# EAGLE board GrapherBlanK7_production_flipped (EAGLE 5.10)
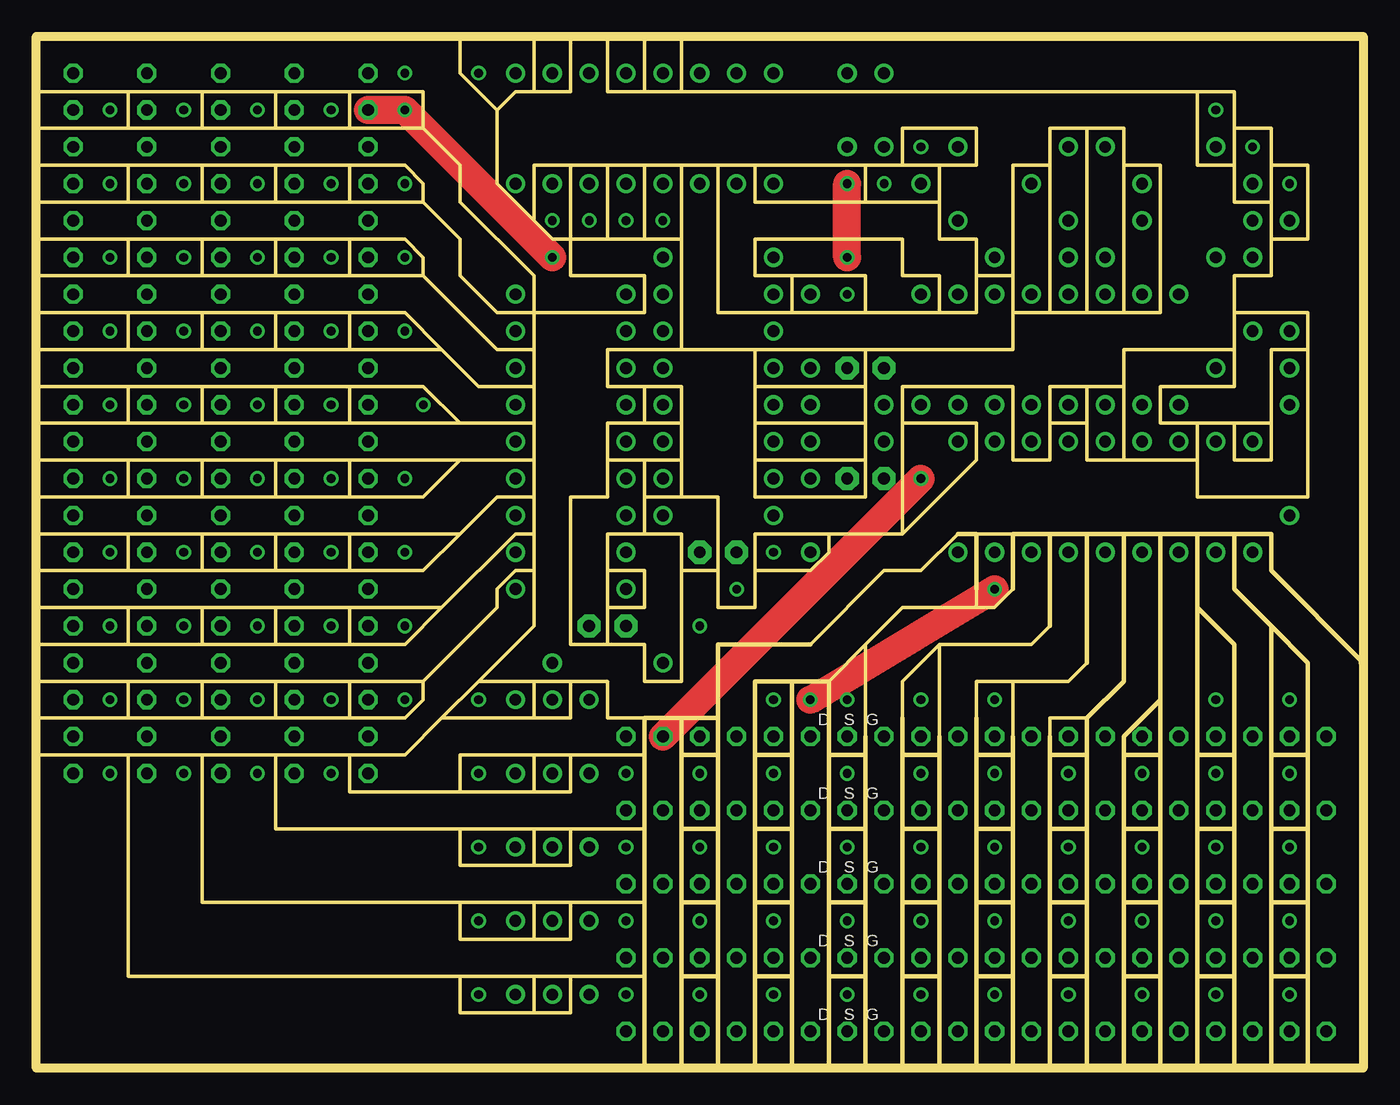
[diagram p0: board, top side]
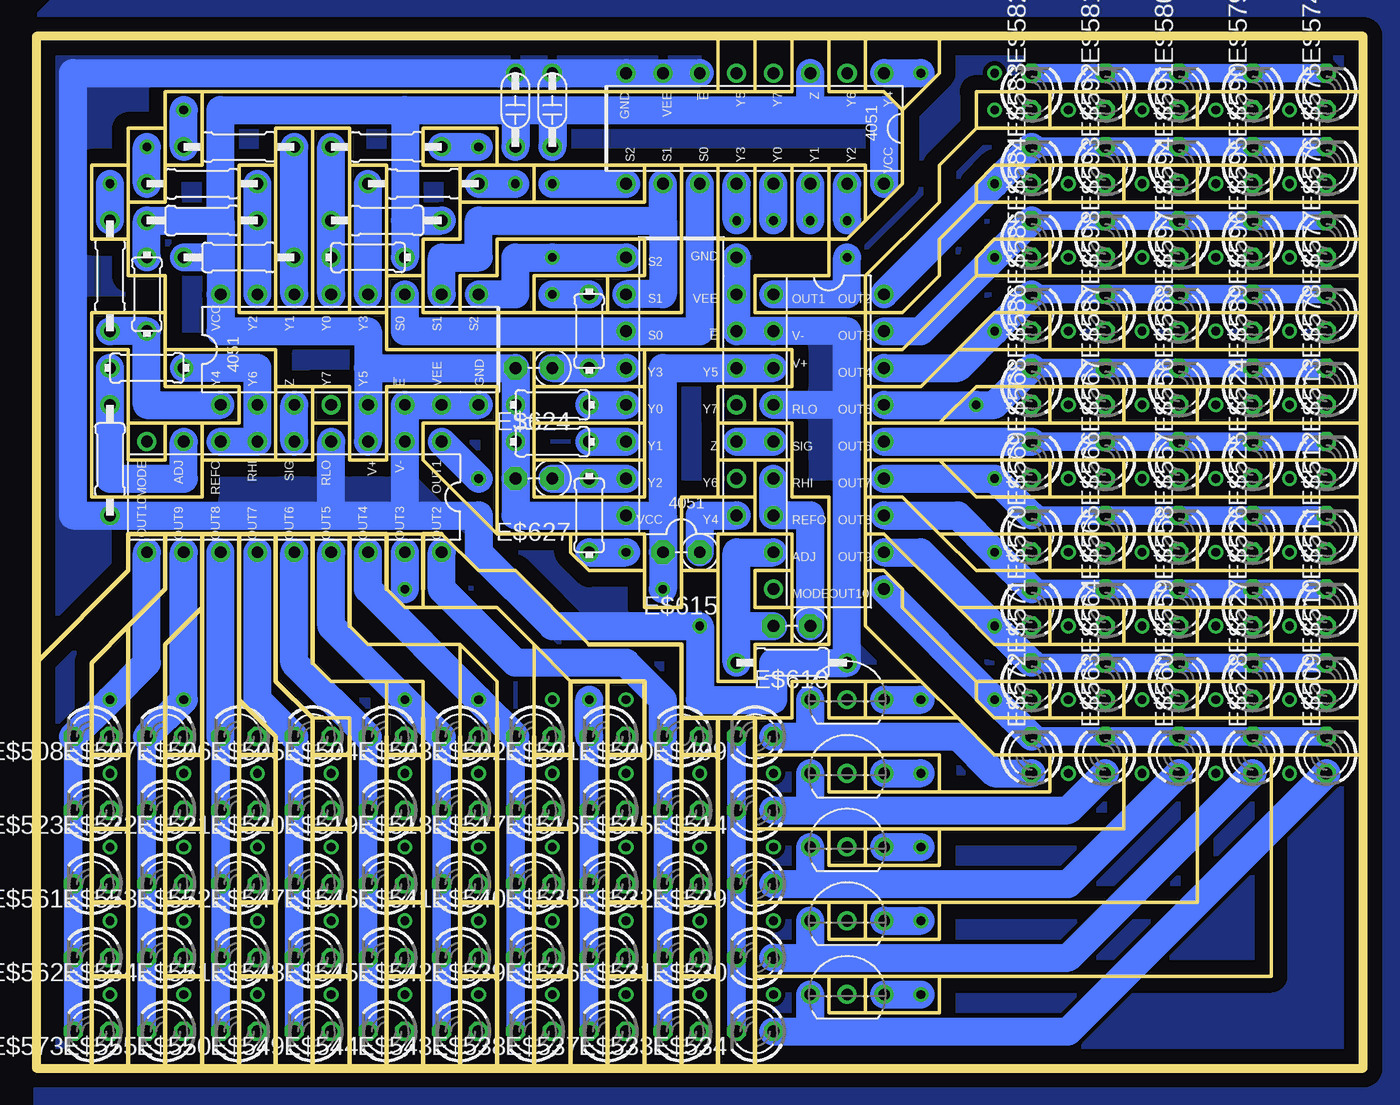
[diagram p1: board, bottom side, seen from below]

Size 91.44 x 71.12 mm. Coordinates in mm from the lower left corner, seen from the top.
Outline: 0,21.59 0,0 41.91,0
Outline: 0,21.59 0,24.13
Outline: 0,24.13 0,26.67
Outline: 0,26.67 0,29.21
Outline: 0,29.21 0,31.75
Outline: 0,31.75 0,34.29
Outline: 0,34.29 0,36.83
Outline: 0,36.83 0,39.37
Outline: 0,39.37 0,41.91
Outline: 0,41.91 0,44.45
Outline: 0,44.45 0,46.99
Outline: 0,46.99 0,49.53
Outline: 0,49.53 0,52.07
Outline: 0,52.07 0,54.61
Outline: 0,54.61 0,57.15
Outline: 0,57.15 0,59.69
Outline: 0,59.69 0,62.23
Outline: 0,62.23 0,64.77
Outline: 0,64.77 0,67.31
Outline: 0,67.31 0,71.12 29.21,71.12
Outline: 29.21,71.12 34.29,71.12
Outline: 34.29,71.12 36.83,71.12
Outline: 36.83,71.12 39.37,71.12
Outline: 39.37,71.12 41.91,71.12
Outline: 41.91,71.12 44.45,71.12
Outline: 44.45,71.12 91.44,71.12 91.44,27.94
Outline: 91.44,27.94 91.44,0 87.63,0
Outline: 87.63,0 85.09,0
Outline: 85.09,0 82.55,0
Outline: 82.55,0 80.01,0
Outline: 80.01,0 77.47,0
Outline: 77.47,0 74.93,0
Outline: 74.93,0 72.39,0
Outline: 72.39,0 69.85,0
Outline: 69.85,0 67.31,0
Outline: 67.31,0 64.77,0
Outline: 64.77,0 62.23,0
Outline: 62.23,0 59.69,0
Outline: 59.69,0 57.15,0
Outline: 57.15,0 54.61,0
Outline: 54.61,0 52.07,0
Outline: 52.07,0 49.53,0
Outline: 49.53,0 46.99,0
Outline: 46.99,0 44.45,0
Outline: 44.45,0 41.91,0
Outline: 87.63,0 87.63,6.35
Outline: 87.63,6.35 87.63,11.43
Outline: 87.63,11.43 87.63,16.51
Outline: 87.63,16.51 87.63,21.59
Outline: 87.63,21.59 87.63,27.94 85.09,30.48
Outline: 85.09,30.48 82.55,33.02 82.55,36.83
Outline: 82.55,36.83 85.09,36.83 85.09,34.29 91.44,27.94
Outline: 82.55,36.83 80.01,36.83
Outline: 80.01,36.83 80.01,31.75
Outline: 80.01,31.75 82.55,29.21 82.55,21.59
Outline: 82.55,21.59 82.55,16.51
Outline: 82.55,16.51 82.55,11.43
Outline: 82.55,11.43 82.55,6.35
Outline: 82.55,6.35 82.55,0
Outline: 85.09,0 85.09,6.35
Outline: 85.09,6.35 85.09,11.43
Outline: 85.09,11.43 85.09,16.51
Outline: 85.09,16.51 85.09,21.59
Outline: 85.09,21.59 85.09,30.48
Outline: 80.01,0 80.01,6.35
Outline: 80.01,6.35 80.01,11.43
Outline: 80.01,11.43 80.01,16.51
Outline: 80.01,16.51 80.01,21.59
Outline: 80.01,21.59 80.01,31.75
Outline: 77.47,0 77.47,6.35
Outline: 77.47,6.35 77.47,11.43
Outline: 77.47,11.43 77.47,16.51
Outline: 77.47,16.51 77.47,21.59
Outline: 77.47,21.59 77.47,25.4
Outline: 77.47,25.4 77.47,36.83
Outline: 77.47,36.83 80.01,36.83
Outline: 77.47,36.83 74.93,36.83
Outline: 74.93,36.83 74.93,26.67 72.39,24.13
Outline: 72.39,24.13 72.39,21.59
Outline: 72.39,21.59 72.39,16.51
Outline: 72.39,16.51 72.39,11.43
Outline: 72.39,11.43 72.39,6.35
Outline: 72.39,6.35 72.39,0
Outline: 74.93,0 74.93,6.35
Outline: 74.93,6.35 74.93,11.43
Outline: 74.93,11.43 74.93,16.51
Outline: 74.93,16.51 74.93,21.59
Outline: 74.93,21.59 74.93,22.86 77.47,25.4
Outline: 69.85,0 69.85,6.35
Outline: 69.85,6.35 69.85,11.43
Outline: 69.85,11.43 69.85,16.51
Outline: 69.85,16.51 69.85,21.59
Outline: 69.85,21.59 69.85,22.86 69.85,24.13 72.39,24.13
Outline: 67.31,0 67.31,6.35
Outline: 67.31,6.35 67.31,11.43
Outline: 67.31,11.43 67.31,16.51
Outline: 67.31,16.51 67.31,21.59
Outline: 67.31,21.59 67.31,22.86 67.31,26.67
Outline: 72.39,36.83 72.39,27.94 71.12,26.67 67.31,26.67
Outline: 72.39,36.83 74.93,36.83
Outline: 64.77,0 64.77,6.35
Outline: 64.77,6.35 64.77,11.43
Outline: 64.77,11.43 64.77,16.51
Outline: 64.77,16.51 64.77,21.59
Outline: 64.77,21.59 64.77,24.13 64.77,26.67 67.31,26.67
Outline: 62.23,0 62.23,6.35
Outline: 62.23,6.35 62.23,11.43
Outline: 62.23,11.43 62.23,16.51
Outline: 62.23,16.51 62.23,21.59
Outline: 62.23,21.59 62.23,22.86 62.23,29.21
Outline: 69.85,36.83 69.85,30.48 68.58,29.21 62.23,29.21
Outline: 69.85,36.83 72.39,36.83
Outline: 85.09,21.59 87.63,21.59
Outline: 85.09,16.51 87.63,16.51
Outline: 85.09,11.43 87.63,11.43
Outline: 85.09,6.35 87.63,6.35
Outline: 80.01,6.35 82.55,6.35
Outline: 80.01,11.43 82.55,11.43
Outline: 80.01,16.51 82.55,16.51
Outline: 80.01,21.59 82.55,21.59
Outline: 74.93,6.35 77.47,6.35
Outline: 74.93,11.43 77.47,11.43
Outline: 74.93,16.51 77.47,16.51
Outline: 74.93,21.59 77.47,21.59
Outline: 69.85,6.35 72.39,6.35
Outline: 69.85,11.43 72.39,11.43
Outline: 69.85,16.51 72.39,16.51
Outline: 69.85,21.59 72.39,21.59
Outline: 64.77,6.35 67.31,6.35
Outline: 64.77,11.43 67.31,11.43
Outline: 64.77,16.51 67.31,16.51
Outline: 64.77,21.59 67.31,21.59
Outline: 59.69,0 59.69,6.35
Outline: 59.69,6.35 59.69,11.43
Outline: 59.69,11.43 59.69,16.51
Outline: 59.69,16.51 59.69,21.59
Outline: 59.69,21.59 59.69,24.13 59.69,26.67 62.23,29.21
Outline: 57.15,0 57.15,6.35
Outline: 57.15,6.35 57.15,11.43
Outline: 57.15,11.43 57.15,16.51
Outline: 57.15,16.51 57.15,21.59
Outline: 57.15,21.59 57.15,22.86 57.15,29.21
Outline: 67.31,36.83 67.31,33.02 66.04,31.75 64.77,31.75
Outline: 67.31,36.83 69.85,36.83
Outline: 62.23,21.59 59.69,21.59
Outline: 62.23,16.51 59.69,16.51
Outline: 59.69,11.43 62.23,11.43
Outline: 59.69,6.35 62.23,6.35
Outline: 54.61,0 54.61,6.35
Outline: 54.61,6.35 54.61,11.43
Outline: 54.61,11.43 54.61,16.51
Outline: 54.61,16.51 54.61,21.59
Outline: 54.61,21.59 54.61,26.67
Outline: 54.61,26.67 52.07,26.67
Outline: 52.07,26.67 52.07,21.59
Outline: 52.07,21.59 52.07,16.51
Outline: 52.07,16.51 52.07,11.43
Outline: 52.07,11.43 52.07,6.35
Outline: 52.07,6.35 52.07,0
Outline: 46.99,0 46.99,6.35
Outline: 46.99,6.35 46.99,11.43
Outline: 46.99,11.43 46.99,16.51
Outline: 46.99,16.51 46.99,21.59
Outline: 46.99,21.59 46.99,24.13
Outline: 46.99,24.13 46.99,29.21 53.34,29.21 58.42,34.29 60.96,34.29 63.5,36.83 64.77,36.83
Outline: 64.77,36.83 64.77,33.02 64.77,31.75
Outline: 52.07,26.67 49.53,26.67 49.53,21.59
Outline: 49.53,21.59 49.53,16.51
Outline: 49.53,16.51 49.53,11.43
Outline: 49.53,11.43 49.53,6.35
Outline: 49.53,6.35 49.53,0
Outline: 44.45,0 44.45,6.35
Outline: 44.45,6.35 44.45,11.43
Outline: 44.45,11.43 44.45,16.51
Outline: 44.45,16.51 44.45,21.59
Outline: 44.45,21.59 44.45,24.13
Outline: 44.45,24.13 41.91,24.13
Outline: 41.91,24.13 41.91,21.59
Outline: 41.91,21.59 41.91,16.51
Outline: 41.91,16.51 41.91,11.43
Outline: 41.91,11.43 41.91,6.35
Outline: 41.91,6.35 41.91,0
Outline: 44.45,24.13 46.99,24.13
Outline: 57.15,21.59 54.61,21.59
Outline: 57.15,16.51 54.61,16.51
Outline: 57.15,11.43 54.61,11.43
Outline: 57.15,6.35 54.61,6.35
Outline: 52.07,6.35 49.53,6.35
Outline: 52.07,11.43 49.53,11.43
Outline: 52.07,16.51 49.53,16.51
Outline: 52.07,21.59 49.53,21.59
Outline: 46.99,6.35 44.45,6.35
Outline: 46.99,11.43 44.45,11.43
Outline: 46.99,16.51 44.45,16.51
Outline: 46.99,21.59 44.45,21.59
Outline: 87.63,49.53 85.09,49.53 85.09,44.45
Outline: 85.09,44.45 85.09,41.91 82.55,41.91 82.55,44.45
Outline: 82.55,44.45 80.01,44.45
Outline: 80.01,44.45 80.01,41.91
Outline: 80.01,41.91 80.01,39.37 87.63,39.37 87.63,49.53
Outline: 87.63,49.53 87.63,52.07 82.55,52.07
Outline: 82.55,52.07 82.55,49.53
Outline: 82.55,49.53 82.55,46.99 77.47,46.99 77.47,44.45 80.01,44.45
Outline: 82.55,44.45 85.09,44.45
Outline: 80.01,41.91 74.93,41.91
Outline: 74.93,41.91 74.93,46.99
Outline: 74.93,46.99 74.93,49.53 82.55,49.53
Outline: 74.93,46.99 72.39,46.99
Outline: 72.39,46.99 72.39,44.45
Outline: 72.39,44.45 72.39,41.91 74.93,41.91
Outline: 72.39,44.45 69.85,44.45
Outline: 69.85,44.45 69.85,46.99 72.39,46.99
Outline: 85.09,59.69 82.55,59.69 82.55,62.23
Outline: 82.55,62.23 80.01,62.23 80.01,67.31
Outline: 80.01,67.31 44.45,67.31
Outline: 44.45,67.31 41.91,67.31
Outline: 41.91,67.31 39.37,67.31 39.37,71.12
Outline: 36.83,71.12 36.83,67.31 34.29,67.31
Outline: 34.29,67.31 33.02,67.31 31.75,66.04
Outline: 31.75,66.04 31.75,60.96 34.29,58.42
Outline: 36.83,62.23 34.29,62.23 34.29,58.42
Outline: 36.83,62.23 39.37,62.23
Outline: 39.37,62.23 41.91,62.23
Outline: 41.91,62.23 44.45,62.23
Outline: 57.15,62.23 59.69,62.23
Outline: 59.69,62.23 59.69,64.77 64.77,64.77 64.77,62.23 62.23,62.23
Outline: 62.23,62.23 62.23,59.69
Outline: 62.23,59.69 62.23,57.15 64.77,57.15 64.77,54.61
Outline: 64.77,54.61 67.31,54.61
Outline: 67.31,54.61 67.31,62.23 69.85,62.23
Outline: 72.39,64.77 69.85,64.77 69.85,62.23
Outline: 72.39,64.77 74.93,64.77 74.93,62.23
Outline: 74.93,52.07 77.47,52.07 77.47,62.23 74.93,62.23
Outline: 74.93,52.07 72.39,52.07
Outline: 72.39,52.07 69.85,52.07
Outline: 69.85,52.07 67.31,52.07
Outline: 67.31,52.07 67.31,49.53 57.15,49.53
Outline: 57.15,49.53 49.53,49.53
Outline: 49.53,49.53 44.45,49.53
Outline: 44.45,49.53 44.45,57.15
Outline: 44.45,57.15 44.45,62.23
Outline: 44.45,62.23 46.99,62.23
Outline: 46.99,62.23 46.99,52.07 52.07,52.07
Outline: 52.07,52.07 57.15,52.07
Outline: 57.15,52.07 62.23,52.07
Outline: 62.23,52.07 64.77,52.07 64.77,54.61
Outline: 67.31,52.07 67.31,54.61
Outline: 74.93,62.23 74.93,52.07
Outline: 72.39,52.07 72.39,64.77
Outline: 69.85,62.23 69.85,52.07
Outline: 59.69,62.23 62.23,62.23
Outline: 62.23,59.69 57.15,59.69
Outline: 57.15,59.69 57.15,62.23
Outline: 49.53,62.23 49.53,59.69 57.15,59.69
Outline: 49.53,62.23 57.15,62.23
Outline: 62.23,52.07 62.23,54.61 59.69,54.61 59.69,57.15 49.53,57.15 49.53,54.61 52.07,54.61
Outline: 57.15,52.07 57.15,54.61 52.07,54.61
Outline: 52.07,54.61 52.07,52.07
Outline: 46.99,62.23 49.53,62.23
Outline: 36.83,57.15 35.56,57.15 34.29,58.42
Outline: 36.83,57.15 36.83,62.23
Outline: 36.83,57.15 39.37,57.15
Outline: 39.37,57.15 39.37,62.23
Outline: 39.37,57.15 41.91,57.15
Outline: 41.91,57.15 41.91,62.23
Outline: 41.91,57.15 44.45,57.15
Outline: 36.83,57.15 36.83,54.61 41.91,54.61 41.91,52.07 34.29,52.07
Outline: 34.29,52.07 34.29,54.61 29.21,59.69 29.21,62.23 26.67,64.77
Outline: 44.45,49.53 39.37,49.53 39.37,46.99 41.91,46.99
Outline: 41.91,46.99 44.45,46.99 44.45,44.45
Outline: 46.99,34.29 46.99,39.37 44.45,39.37
Outline: 46.99,34.29 46.99,31.75 49.53,31.75 49.53,34.29
Outline: 49.53,34.29 49.53,36.83 54.61,36.83
Outline: 54.61,36.83 59.69,36.83
Outline: 59.69,44.45 59.69,46.99 67.31,46.99 67.31,41.91 69.85,41.91 69.85,44.45
Outline: 85.09,59.69 85.09,57.15
Outline: 85.09,57.15 85.09,54.61 82.55,54.61 82.55,52.07
Outline: 80.01,67.31 82.55,67.31 82.55,64.77
Outline: 82.55,64.77 82.55,62.23
Outline: 82.55,64.77 85.09,64.77 85.09,62.23
Outline: 85.09,62.23 85.09,59.69
Outline: 85.09,62.23 87.63,62.23 87.63,57.15 85.09,57.15
Outline: 49.53,34.29 53.34,34.29 54.61,35.56 54.61,36.83
Outline: 59.69,44.45 64.77,44.45 64.77,41.91 59.69,36.83
Outline: 49.53,41.91 49.53,39.37 57.15,39.37 57.15,41.91
Outline: 49.53,41.91 49.53,44.45
Outline: 49.53,44.45 49.53,46.99
Outline: 49.53,46.99 49.53,49.53
Outline: 57.15,41.91 57.15,44.45
Outline: 57.15,44.45 57.15,46.99
Outline: 57.15,46.99 57.15,49.53
Outline: 57.15,46.99 49.53,46.99
Outline: 49.53,44.45 57.15,44.45
Outline: 57.15,41.91 49.53,41.91
Outline: 29.21,71.12 29.21,68.58 31.75,66.04
Outline: 34.29,71.12 34.29,67.31
Outline: 39.37,29.21 41.91,29.21 41.91,26.67 44.45,26.67 44.45,34.29
Outline: 39.37,29.21 39.37,31.75
Outline: 39.37,31.75 41.91,31.75 41.91,34.29 39.37,34.29
Outline: 39.37,34.29 39.37,36.83 41.91,36.83
Outline: 41.91,36.83 44.45,36.83 44.45,34.29
Outline: 44.45,34.29 46.99,34.29
Outline: 44.45,39.37 41.91,39.37
Outline: 41.91,39.37 41.91,36.83
Outline: 41.91,39.37 41.91,41.91
Outline: 41.91,41.91 39.37,41.91
Outline: 39.37,41.91 39.37,39.37 36.83,39.37 36.83,29.21 39.37,29.21
Outline: 39.37,41.91 39.37,44.45 41.91,44.45
Outline: 41.91,44.45 44.45,44.45
Outline: 44.45,44.45 44.45,41.91
Outline: 44.45,41.91 41.91,41.91
Outline: 44.45,41.91 44.45,39.37
Outline: 41.91,44.45 41.91,46.99
Outline: 39.37,31.75 39.37,34.29
Outline: 41.91,24.13 39.37,24.13 39.37,26.67 36.83,26.67
Outline: 36.83,26.67 36.83,24.13 34.29,24.13
Outline: 34.29,24.13 34.29,26.67
Outline: 34.29,26.67 36.83,26.67
Outline: 34.29,24.13 27.94,24.13
Outline: 27.94,24.13 30.48,26.67
Outline: 30.48,26.67 34.29,26.67
Outline: 41.91,21.59 36.83,21.59
Outline: 36.83,21.59 34.29,21.59
Outline: 34.29,21.59 29.21,21.59 29.21,19.05
Outline: 29.21,19.05 34.29,19.05
Outline: 34.29,19.05 34.29,21.59
Outline: 36.83,21.59 36.83,19.05 34.29,19.05
Outline: 41.91,16.51 36.83,16.51
Outline: 36.83,16.51 34.29,16.51
Outline: 34.29,16.51 29.21,16.51
Outline: 29.21,16.51 16.51,16.51 16.51,21.59
Outline: 16.51,21.59 21.59,21.59
Outline: 21.59,21.59 21.59,19.05 29.21,19.05
Outline: 41.91,71.12 41.91,67.31
Outline: 44.45,71.12 44.45,67.31
Outline: 36.83,6.35 36.83,3.81 34.29,3.81
Outline: 34.29,3.81 34.29,6.35
Outline: 34.29,6.35 36.83,6.35
Outline: 36.83,16.51 36.83,13.97 34.29,13.97
Outline: 34.29,13.97 34.29,16.51
Outline: 36.83,11.43 36.83,8.89 34.29,8.89
Outline: 34.29,8.89 34.29,11.43
Outline: 41.91,11.43 34.29,11.43
Outline: 34.29,11.43 29.21,11.43
Outline: 29.21,11.43 11.43,11.43 11.43,21.59
Outline: 11.43,21.59 16.51,21.59
Outline: 34.29,13.97 29.21,13.97 29.21,16.51
Outline: 34.29,8.89 29.21,8.89 29.21,11.43
Outline: 34.29,3.81 29.21,3.81 29.21,6.35
Outline: 29.21,6.35 34.29,6.35
Outline: 27.94,24.13 25.4,21.59 21.59,21.59
Outline: 30.48,26.67 34.29,30.48 34.29,34.29
Outline: 34.29,34.29 33.02,34.29 31.75,33.02 31.75,31.75 26.67,26.67
Outline: 11.43,21.59 6.35,21.59
Outline: 6.35,21.59 0,21.59
Outline: 0,24.13 6.35,24.13
Outline: 6.35,24.13 11.43,24.13
Outline: 11.43,24.13 16.51,24.13
Outline: 16.51,24.13 21.59,24.13
Outline: 29.21,6.35 6.35,6.35 6.35,21.59
Outline: 67.31,36.83 64.77,36.83
Outline: 34.29,34.29 34.29,36.83
Outline: 34.29,36.83 33.02,36.83 27.94,31.75
Outline: 27.94,31.75 25.4,29.21 21.59,29.21
Outline: 34.29,36.83 34.29,39.37
Outline: 34.29,39.37 31.75,39.37 29.21,36.83
Outline: 29.21,36.83 26.67,34.29 21.59,34.29
Outline: 34.29,39.37 34.29,41.91
Outline: 34.29,41.91 29.21,41.91
Outline: 29.21,41.91 26.67,39.37 21.59,39.37
Outline: 34.29,41.91 34.29,44.45
Outline: 34.29,44.45 29.21,44.45
Outline: 34.29,44.45 34.29,46.99
Outline: 34.29,46.99 30.48,46.99 27.94,49.53
Outline: 34.29,46.99 34.29,49.53
Outline: 34.29,49.53 31.75,49.53 26.67,54.61
Outline: 34.29,49.53 34.29,52.07
Outline: 26.67,64.77 21.59,64.77
Outline: 21.59,64.77 16.51,64.77
Outline: 16.51,64.77 11.43,64.77
Outline: 11.43,64.77 6.35,64.77
Outline: 6.35,64.77 0,64.77
Outline: 26.67,59.69 26.67,60.96 25.4,62.23 21.59,62.23
Outline: 21.59,62.23 16.51,62.23
Outline: 16.51,62.23 11.43,62.23
Outline: 11.43,62.23 6.35,62.23
Outline: 6.35,62.23 0,62.23
Outline: 26.67,54.61 26.67,55.88 25.4,57.15 21.59,57.15
Outline: 21.59,57.15 16.51,57.15
Outline: 16.51,57.15 11.43,57.15
Outline: 11.43,57.15 6.35,57.15
Outline: 6.35,57.15 0,57.15
Outline: 26.67,59.69 21.59,59.69
Outline: 21.59,59.69 16.51,59.69
Outline: 16.51,59.69 11.43,59.69
Outline: 11.43,59.69 6.35,59.69
Outline: 6.35,59.69 0,59.69
Outline: 27.94,49.53 21.59,49.53
Outline: 21.59,49.53 16.51,49.53
Outline: 16.51,49.53 11.43,49.53
Outline: 11.43,49.53 6.35,49.53
Outline: 6.35,49.53 0,49.53
Outline: 0,52.07 6.35,52.07
Outline: 6.35,52.07 11.43,52.07
Outline: 11.43,52.07 16.51,52.07
Outline: 16.51,52.07 21.59,52.07
Outline: 21.59,62.23 21.59,59.69
Outline: 16.51,62.23 16.51,59.69
Outline: 11.43,62.23 11.43,59.69
Outline: 6.35,62.23 6.35,59.69
Outline: 21.59,67.31 26.67,67.31 26.67,64.77
Outline: 21.59,67.31 16.51,67.31
Outline: 16.51,67.31 11.43,67.31
Outline: 11.43,67.31 6.35,67.31
Outline: 6.35,67.31 0,67.31
Outline: 21.59,64.77 21.59,67.31
Outline: 16.51,64.77 16.51,67.31
Outline: 11.43,64.77 11.43,67.31
Outline: 6.35,64.77 6.35,67.31
Outline: 26.67,54.61 21.59,54.61
Outline: 21.59,54.61 16.51,54.61
Outline: 16.51,54.61 11.43,54.61
Outline: 11.43,54.61 6.35,54.61
Outline: 6.35,54.61 0,54.61
Outline: 21.59,54.61 21.59,57.15
Outline: 16.51,54.61 16.51,57.15
Outline: 11.43,54.61 11.43,57.15
Outline: 6.35,54.61 6.35,57.15
Outline: 21.59,52.07 25.4,52.07 27.94,49.53
Outline: 21.59,52.07 21.59,49.53
Outline: 16.51,52.07 16.51,49.53
Outline: 11.43,52.07 11.43,49.53
Outline: 6.35,52.07 6.35,49.53
Outline: 29.21,44.45 26.67,46.99 21.59,46.99
Outline: 21.59,46.99 16.51,46.99
Outline: 16.51,46.99 11.43,46.99
Outline: 11.43,46.99 6.35,46.99
Outline: 6.35,46.99 0,46.99
Outline: 29.21,44.45 21.59,44.45
Outline: 21.59,44.45 16.51,44.45
Outline: 16.51,44.45 11.43,44.45
Outline: 11.43,44.45 6.35,44.45
Outline: 6.35,44.45 0,44.45
Outline: 21.59,44.45 21.59,46.99
Outline: 16.51,44.45 16.51,46.99
Outline: 11.43,44.45 11.43,46.99
Outline: 6.35,44.45 6.35,46.99
Outline: 29.21,41.91 21.59,41.91
Outline: 21.59,41.91 16.51,41.91
Outline: 16.51,41.91 11.43,41.91
Outline: 11.43,41.91 6.35,41.91
Outline: 6.35,41.91 0,41.91
Outline: 21.59,39.37 16.51,39.37
Outline: 16.51,39.37 11.43,39.37
Outline: 11.43,39.37 6.35,39.37
Outline: 6.35,39.37 0,39.37
Outline: 21.59,39.37 21.59,41.91
Outline: 16.51,39.37 16.51,41.91
Outline: 11.43,39.37 11.43,41.91
Outline: 6.35,39.37 6.35,41.91
Outline: 21.59,34.29 16.51,34.29
Outline: 16.51,34.29 11.43,34.29
Outline: 11.43,34.29 6.35,34.29
Outline: 6.35,34.29 0,34.29
Outline: 29.21,36.83 21.59,36.83
Outline: 21.59,36.83 16.51,36.83
Outline: 16.51,36.83 11.43,36.83
Outline: 11.43,36.83 6.35,36.83
Outline: 6.35,36.83 0,36.83
Outline: 21.59,36.83 21.59,34.29
Outline: 16.51,36.83 16.51,34.29
Outline: 11.43,36.83 11.43,34.29
Outline: 6.35,36.83 6.35,34.29
Outline: 27.94,31.75 21.59,31.75
Outline: 21.59,31.75 16.51,31.75
Outline: 16.51,31.75 11.43,31.75
Outline: 11.43,31.75 6.35,31.75
Outline: 6.35,31.75 0,31.75
Outline: 21.59,29.21 16.51,29.21
Outline: 16.51,29.21 11.43,29.21
Outline: 11.43,29.21 6.35,29.21
Outline: 6.35,29.21 0,29.21
Outline: 21.59,29.21 21.59,31.75
Outline: 16.51,29.21 16.51,31.75
Outline: 11.43,29.21 11.43,31.75
Outline: 6.35,29.21 6.35,31.75
Outline: 21.59,26.67 16.51,26.67
Outline: 16.51,26.67 11.43,26.67
Outline: 11.43,26.67 6.35,26.67
Outline: 6.35,26.67 0,26.67
Outline: 21.59,26.67 21.59,24.13
Outline: 16.51,26.67 16.51,24.13
Outline: 11.43,26.67 11.43,24.13
Outline: 6.35,26.67 6.35,24.13
Outline: 36.83,6.35 41.91,6.35
Outline: 64.77,31.75 59.69,31.75 57.15,29.21
Outline: 34.29,52.07 31.75,52.07 29.21,54.61 29.21,57.15 26.67,59.69
Outline: 21.59,24.13 25.4,24.13 26.67,25.4 26.67,26.67
Outline: 26.67,26.67 21.59,26.67
Outline: 54.61,26.67 57.15,29.21
Outline: 59.69,36.83 59.69,44.45
Copper layers (1*16): Top 0.035mm / dielectric 1.5mm / Bottom 0.035mm
Design rules "default": minimum track width 10mil, minimum drill 24mil, track to track 8mil, track to pad 8mil, pad to pad 8mil, via to via 8mil, smd to smd 8mil, copper to edge 40mil, drill to drill 8mil, minimum pad ring 10mil, minimum via ring 8mil, stop-mask expansion 4mil, vias tented up to drill 0mil, thermal gap 10mil
Milling: 1 lines

## Footprints (pad centres in the part's own frame; a part is rotated, then mirrored left to right if it is on the bottom)
RESISTOR-S2 = drill 0.813 round: IN1 -2.54,0; IN2 2.54,0
SMALL-CAPACITOR = drill 0.813 round: IN1 0,0; IN2 5.08,0
LED3MM = drill 0.813 octagon: A -1.27,0; K 1.27,0
LM3914-10LED-BARGRAPH = drill 0.813 round: 1!R -3.81,1.27; 1!S -3.81,3.81; 1Q 3.81,1.27; 2!R -3.81,-3.81; 2!S -3.81,-6.35; 2Q 3.81,-8.89; 2Q1 3.81,-11.43; 2Q3 -3.81,-11.43; 3!R 3.81,-1.27; 3!S 3.81,-3.81; 3Q 3.81,-6.35; 4!R 3.81,3.81; 4!S 3.81,6.35; 4Q -3.81,8.89; GND -3.81,-8.89; NC -3.81,6.35; OE -3.81,-1.27; VCC 3.81,8.89
4051-ANALOG-MUX = drill 0.813 round: CLOCK 3.81,-6.35; GND -3.81,-8.89; Q0 3.81,-8.89; Q1 -3.81,-6.35; Q2 -3.81,-3.81; Q3 -3.81,-1.27; Q4 -3.81,3.81; Q5 -3.81,6.35; Q6 -3.81,1.27; Q7 3.81,1.27; Q8 3.81,-1.27; Q9 3.81,3.81; Q10 3.81,6.35; Q11 -3.81,8.89; RESET 3.81,-3.81; VCC 3.81,8.89
RESISTOR = drill 0.813 round: IN1 -3.81,0; IN2 3.81,0
RS-2,5 = drill 0.813 pad 1.6 octagon: 1 -1.27,0; 2 1.27,0
TRANSISTOR = drill 0.8 round: P$1 0,0; P$2 2.54,0; P$3 -2.54,0

## Placement (x,y rotation side)
E$1  [RESISTOR-S2]  53.34,38.1 90 bottom
E$2  [RESISTOR-S2]  55.88,45.72 180 bottom
E$3  [RESISTOR-S2]  55.88,43.18 180 bottom
E$5  [SMALL-CAPACITOR]  55.88,63.5 90 bottom
E$6  [SMALL-CAPACITOR]  58.42,63.5 90 bottom
E$499  [LED3MM]  41.91,22.86 180 bottom
E$500  [LED3MM]  46.99,22.86 180 bottom
E$501  [LED3MM]  52.07,22.86 180 bottom
E$502  [LED3MM]  57.15,22.86 180 bottom
E$503  [LED3MM]  62.23,22.86 180 bottom
E$504  [LED3MM]  67.31,22.86 180 bottom
E$505  [LED3MM]  72.39,22.86 180 bottom
E$506  [LED3MM]  77.47,22.86 180 bottom
E$507  [LED3MM]  82.55,22.86 180 bottom
E$508  [LED3MM]  87.63,22.86 180 bottom
E$509  [LED3MM]  2.54,21.59 90 bottom
E$510  [LED3MM]  2.54,26.67 90 bottom
E$511  [LED3MM]  2.54,31.75 90 bottom
E$512  [LED3MM]  2.54,36.83 90 bottom
E$513  [LED3MM]  2.54,41.91 90 bottom
E$514  [LED3MM]  41.91,17.78 180 bottom
E$515  [LED3MM]  46.99,17.78 180 bottom
E$516  [LED3MM]  52.07,17.78 180 bottom
E$517  [LED3MM]  57.15,17.78 180 bottom
E$518  [LED3MM]  62.23,17.78 180 bottom
E$519  [LED3MM]  67.31,17.78 180 bottom
E$520  [LED3MM]  72.39,17.78 180 bottom
E$521  [LED3MM]  77.47,17.78 180 bottom
E$522  [LED3MM]  82.55,17.78 180 bottom
E$523  [LED3MM]  87.63,17.78 180 bottom
E$524  [LED3MM]  7.62,41.91 90 bottom
E$525  [LED3MM]  7.62,36.83 90 bottom
E$526  [LED3MM]  7.62,31.75 90 bottom
E$527  [LED3MM]  7.62,26.67 90 bottom
E$528  [LED3MM]  7.62,21.59 90 bottom
E$529  [LED3MM]  41.91,12.7 180 bottom
E$530  [LED3MM]  41.91,7.62 180 bottom
E$531  [LED3MM]  46.99,7.62 180 bottom
E$532  [LED3MM]  46.99,12.7 180 bottom
E$533  [LED3MM]  46.99,2.54 180 bottom
E$534  [LED3MM]  41.91,2.54 180 bottom
E$535  [LED3MM]  52.07,12.7 180 bottom
E$536  [LED3MM]  52.07,7.62 180 bottom
E$537  [LED3MM]  52.07,2.54 180 bottom
E$538  [LED3MM]  57.15,2.54 180 bottom
E$539  [LED3MM]  57.15,7.62 180 bottom
E$540  [LED3MM]  57.15,12.7 180 bottom
E$541  [LED3MM]  62.23,12.7 180 bottom
E$542  [LED3MM]  62.23,7.62 180 bottom
E$543  [LED3MM]  62.23,2.54 180 bottom
E$544  [LED3MM]  67.31,2.54 180 bottom
E$545  [LED3MM]  67.31,7.62 180 bottom
E$546  [LED3MM]  67.31,12.7 180 bottom
E$547  [LED3MM]  72.39,12.7 180 bottom
E$548  [LED3MM]  72.39,7.62 180 bottom
E$549  [LED3MM]  72.39,2.54 180 bottom
E$550  [LED3MM]  77.47,2.54 180 bottom
E$551  [LED3MM]  77.47,7.62 180 bottom
E$552  [LED3MM]  77.47,12.7 180 bottom
E$553  [LED3MM]  82.55,12.7 180 bottom
E$554  [LED3MM]  82.55,7.62 180 bottom
E$555  [LED3MM]  82.55,2.54 180 bottom
E$556  [LED3MM]  12.7,41.91 90 bottom
E$557  [LED3MM]  12.7,36.83 90 bottom
E$558  [LED3MM]  12.7,31.75 90 bottom
E$559  [LED3MM]  12.7,26.67 90 bottom
E$560  [LED3MM]  12.7,21.59 90 bottom
E$561  [LED3MM]  87.63,12.7 180 bottom
E$562  [LED3MM]  87.63,7.62 180 bottom
E$563  [LED3MM]  17.78,21.59 90 bottom
E$564  [LED3MM]  17.78,26.67 90 bottom
E$565  [LED3MM]  17.78,31.75 90 bottom
E$566  [LED3MM]  17.78,36.83 90 bottom
E$567  [LED3MM]  17.78,41.91 90 bottom
E$568  [LED3MM]  22.86,41.91 90 bottom
E$569  [LED3MM]  22.86,36.83 90 bottom
E$570  [LED3MM]  22.86,31.75 90 bottom
E$571  [LED3MM]  22.86,26.67 90 bottom
E$572  [LED3MM]  22.86,21.59 90 bottom
E$573  [LED3MM]  87.63,2.54 180 bottom
E$574  [LED3MM]  2.54,67.31 90 bottom
E$575  [LED3MM]  2.54,62.23 90 bottom
E$576  [LED3MM]  2.54,57.15 90 bottom
E$577  [LED3MM]  2.54,52.07 90 bottom
E$578  [LED3MM]  2.54,46.99 90 bottom
E$579  [LED3MM]  7.62,67.31 90 bottom
E$580  [LED3MM]  12.7,67.31 90 bottom
E$581  [LED3MM]  17.78,67.31 90 bottom
E$582  [LED3MM]  22.86,67.31 90 bottom
E$583  [LED3MM]  22.86,62.23 90 bottom
E$584  [LED3MM]  22.86,57.15 90 bottom
E$585  [LED3MM]  22.86,52.07 90 bottom
E$586  [LED3MM]  22.86,46.99 90 bottom
E$587  [LED3MM]  17.78,46.99 90 bottom
E$588  [LED3MM]  12.7,46.99 90 bottom
E$589  [LED3MM]  7.62,46.99 90 bottom
E$590  [LED3MM]  7.62,62.23 90 bottom
E$591  [LED3MM]  12.7,62.23 90 bottom
E$592  [LED3MM]  17.78,62.23 90 bottom
E$593  [LED3MM]  17.78,57.15 90 bottom
E$594  [LED3MM]  12.7,57.15 90 bottom
E$595  [LED3MM]  7.62,57.15 90 bottom
E$596  [LED3MM]  7.62,52.07 90 bottom
E$597  [LED3MM]  12.7,52.07 90 bottom
E$598  [LED3MM]  17.78,52.07 90 bottom
E$599  [LM3914-10LED-BARGRAPH]  72.39,39.37 270 bottom
E$600  [4051-ANALOG-MUX]  69.85,49.53 90 bottom
E$601  [RESISTOR-S2]  83.82,48.26 0 bottom
E$602  [RESISTOR]  86.36,41.91 90 bottom
E$603  [RESISTOR]  77.47,63.5 180 bottom
E$604  [RESISTOR]  80.01,58.42 180 bottom
E$605  [RESISTOR]  77.47,55.88 180 bottom
E$606  [RESISTOR]  80.01,60.96 180 bottom
E$607  [RESISTOR]  67.31,58.42 180 bottom
E$609  [RESISTOR-S2]  68.58,55.88 0 bottom
E$610  [RS-2,5]  39.37,30.48 180 bottom
E$611  [RESISTOR]  86.36,54.61 90 bottom
E$613  [LM3914-10LED-BARGRAPH]  36.83,44.45 0 bottom
E$614  [4051-ANALOG-MUX]  46.99,46.99 180 bottom
E$615  [RS-2,5]  46.99,35.56 180 bottom
E$616  [RESISTOR]  39.37,27.94 0 bottom
E$617  [TRANSISTOR]  35.56,20.32 0 bottom
E$618  [TRANSISTOR]  35.56,25.4 0 bottom
E$619  [TRANSISTOR]  35.56,15.24 0 bottom
E$620  [TRANSISTOR]  35.56,10.16 0 bottom
E$621  [TRANSISTOR]  35.56,5.08 0 bottom
E$623  [4051-ANALOG-MUX]  41.91,64.77 270 bottom
E$624  [RS-2,5]  57.15,48.26 180 bottom
E$627  [RS-2,5]  57.15,40.64 180 bottom
E$628  [RESISTOR-S2]  53.34,50.8 90 bottom
E$629  [RESISTOR]  64.77,60.96 180 bottom
E$630  [RESISTOR]  67.31,63.5 180 bottom
E$631  [RESISTOR-S2]  83.82,53.34 90 bottom

## Library data of the parts
E$1-E$3 E$5 E$6 E$599-E$607 E$609 E$611 E$613 E$614 E$616-E$621 E$623 E$628-E$631 = RussellLibrary
E$499-E$598 = led
E$610 E$615 E$624 E$627 = discrete

## Nets
GND: E$599.1!R E$599.NC E$600.GND E$600.Q2 E$613.1!R E$613.NC E$614.GND E$614.Q2 E$616.IN2 E$623.GND E$623.Q2
S$3: E$613.4Q
S$4: E$501.K E$537.K E$599.4!S
S$193: E$613.OE E$614.Q4
S$194: E$613.2!R E$613.2!S
S$195: E$509.K E$572.K E$613.2Q1
S$196: E$613.GND E$616.IN1
S$198: E$504.K E$544.K E$599.3!R
S$199: E$505.K E$549.K E$599.3!S
S$200: E$506.K E$550.K E$599.3Q
S$201: E$507.K E$555.K E$599.2Q
S$202: E$508.K E$573.K E$599.2Q1
S$203: E$600.CLOCK E$614.CLOCK E$623.CLOCK
S$204: E$499.A E$572.A E$618.P$3
S$205: E$514.A E$563.A E$617.P$3
S$206: E$529.A E$560.A E$619.P$3
S$207: E$513.K E$568.K
S$208: E$600.Q10
S$209: E$528.A E$530.A E$620.P$3
S$210: E$509.A E$534.A E$621.P$3
S$211: E$575.K E$583.K E$613.VCC
S$213: E$503.K E$543.K E$599.1Q
S$214: E$499.K E$534.K E$599.4Q
S$216: E$614.Q8 E$624.1
S$218: E$623.Q11
S$219: E$621.P$2
S$220: E$620.P$2
S$221: E$619.P$2
S$222: E$617.P$2
S$223: E$599.OE E$600.Q4
S$224: E$599.GND
S$225: E$599.2!R E$599.2!S
S$226: E$502.K E$538.K E$599.4!R
S$227: E$600.Q9 E$603.IN1
S$228: E$623.Q10
S$229: E$623.Q9
S$230: E$623.Q8
S$231: E$623.Q7
S$232: E$600.Q7 E$630.IN2
S$233: E$600.Q8
S$234: E$600.Q0 E$614.Q0 E$623.Q0
S$235: E$500.K E$533.K E$599.VCC
S$236: E$600.RESET E$614.RESET E$623.RESET
S$237: E$618.P$2
S$238: E$614.Q7
S$239: E$614.Q9
S$240: E$614.Q10 E$627.1
S$241: E$510.K E$571.K E$613.2Q
S$242: E$511.K E$570.K E$613.3Q
S$243: E$512.K E$569.K E$613.3!S
S$244: E$613.3!R
S$245: E$600.Q11 E$611.IN1
S$246: E$578.K E$586.K E$613.1Q
S$247: E$577.K E$585.K E$613.4!R
S$248: E$576.K E$584.K E$613.4!S
S$250: E$614.Q11 E$615.1
S$251: E$5.IN1 E$6.IN1 E$599.1!S E$600.VCC E$604.IN2 E$605.IN2 E$607.IN1 E$609.IN2 E$613.1!S E$614.VCC E$615.2 E$623.Q4 E$623.VCC E$627.2 E$631.IN2
S$252: E$574.K E$582.K
S$253: E$629.IN1
S$254: E$630.IN1
S$255: E$611.IN2
S$256: E$603.IN2
S$257: E$606.IN2
S$259: E$628.IN2

## Tracks (layer width: path | path; a pad name or v marks a point on that pad's centre or on a via)
GND  (via drill 0.6)
  Bottom 1.93: E$600.GND E$600.Q2 E$599.NC 66.04,38.1 | E$623.Q2 E$623.GND 88.9,68.58 88.9,38.1 71.12,38.1 | 71.12,38.1 66.04,38.1 | 71.12,38.1 E$599.1!R | E$614.GND E$614.Q2 E$613.NC 35.56,50.8 35.56,45.72 | 35.56,45.72 E$613.1!R | 35.56,45.72 E$616.IN2 40.64,27.94 40.64,25.4 45.72,25.4 v45.72,30.48 55.88,30.48 60.96,35.56 60.96,38.1 66.04,38.1
  pour Bottom (isolate 0.305, no thermals): 91.44,72.39 91.44,-2.54 -2.54,-2.54 -2.54,73.66 -1.27,74.93 88.9,74.93
S$1  (via drill 0.6)
  other vias: 25.4,68.58
S$2  (via drill 0.6)
  other vias: 40.64,5.08
S$3  (via drill 0.6)
  Top 1.93: v35.56,55.88 v25.4,66.04 22.86,66.04
  Bottom 1.93: E$613.4Q 35.56,53.34 v35.56,55.88
S$4  (via drill 0.6)
  Top 1.93: v53.34,25.4 v66.04,33.02
  Bottom 1.27: E$537.K E$501.K
  Bottom 1.93: v66.04,33.02 E$599.4!S | E$501.K v53.34,25.4
  other vias: 66.04,35.56 53.34,22.86
S$5  (via drill 0.6)
  other vias: 45.72,5.08
S$6  (via drill 0.6)
  other vias: 50.8,5.08
S$7  (via drill 0.6)
  other vias: 55.88,5.08
S$8  (via drill 0.6)
  other vias: 60.96,5.08
S$9  (via drill 0.6)
  other vias: 66.04,5.08
S$10  (via drill 0.6)
  other vias: 71.12,5.08
S$11  (via drill 0.6)
  other vias: 76.2,5.08
S$12  (via drill 0.6)
  other vias: 81.28,5.08
S$13  (via drill 0.6)
  other vias: 86.36,5.08
S$14  (via drill 0.6)
  other vias: 40.64,10.16
S$15  (via drill 0.6)
  other vias: 45.72,10.16
S$16  (via drill 0.6)
  other vias: 50.8,10.16
S$17  (via drill 0.6)
  other vias: 55.88,10.16
S$18  (via drill 0.6)
  other vias: 60.96,10.16
S$19  (via drill 0.6)
  other vias: 66.04,10.16
S$20  (via drill 0.6)
  other vias: 71.12,10.16
S$21  (via drill 0.6)
  other vias: 76.2,10.16
S$22  (via drill 0.6)
  other vias: 81.28,10.16
S$23  (via drill 0.6)
  other vias: 86.36,10.16
S$24  (via drill 0.6)
  other vias: 86.36,15.24
S$25  (via drill 0.6)
  other vias: 81.28,15.24
S$26  (via drill 0.6)
  other vias: 76.2,15.24
S$27  (via drill 0.6)
  other vias: 71.12,15.24
S$28  (via drill 0.6)
  other vias: 66.04,15.24
S$29  (via drill 0.6)
  other vias: 60.96,15.24
S$30  (via drill 0.6)
  other vias: 55.88,15.24
S$31  (via drill 0.6)
  other vias: 50.8,15.24
S$32  (via drill 0.6)
  other vias: 45.72,15.24
S$33  (via drill 0.6)
  other vias: 40.64,15.24
S$34  (via drill 0.6)
  other vias: 40.64,20.32
S$35  (via drill 0.6)
  other vias: 45.72,20.32
S$36  (via drill 0.6)
  other vias: 50.8,20.32
S$37  (via drill 0.6)
  other vias: 55.88,20.32
S$38  (via drill 0.6)
  other vias: 60.96,20.32
S$39  (via drill 0.6)
  other vias: 66.04,20.32
S$40  (via drill 0.6)
  other vias: 71.12,20.32
S$41  (via drill 0.6)
  other vias: 76.2,20.32
S$42  (via drill 0.6)
  other vias: 81.28,20.32
S$43  (via drill 0.6)
  other vias: 86.36,20.32
S$44  (via drill 0.6)
  other vias: 50.8,25.4
S$45  (via drill 0.6)
  other vias: 55.88,25.4
S$46  (via drill 0.6)
  other vias: 5.08,66.04
S$47  (via drill 0.6)
  other vias: 5.08,60.96
S$48  (via drill 0.6)
  other vias: 5.08,55.88
S$49  (via drill 0.6)
  other vias: 5.08,50.8
S$50  (via drill 0.6)
  other vias: 5.08,45.72
S$51  (via drill 0.6)
  other vias: 5.08,40.64
S$52  (via drill 0.6)
  other vias: 5.08,35.56
S$53  (via drill 0.6)
  other vias: 5.08,30.48
S$54  (via drill 0.6)
  other vias: 5.08,25.4
S$55  (via drill 0.6)
  other vias: 10.16,66.04
S$56  (via drill 0.6)
  other vias: 10.16,60.96
S$57  (via drill 0.6)
  other vias: 10.16,55.88
S$58  (via drill 0.6)
  other vias: 10.16,50.8
S$59  (via drill 0.6)
  other vias: 10.16,45.72
S$60  (via drill 0.6)
  other vias: 10.16,40.64
S$61  (via drill 0.6)
  other vias: 10.16,35.56
S$62  (via drill 0.6)
  other vias: 10.16,30.48
S$63  (via drill 0.6)
  other vias: 10.16,25.4
S$64  (via drill 0.6)
  other vias: 15.24,66.04
S$65  (via drill 0.6)
  other vias: 15.24,60.96
S$66  (via drill 0.6)
  other vias: 15.24,55.88
S$67  (via drill 0.6)
  other vias: 15.24,50.8
S$68  (via drill 0.6)
  other vias: 15.24,45.72
S$69  (via drill 0.6)
  other vias: 15.24,40.64
S$70  (via drill 0.6)
  other vias: 15.24,35.56
S$71  (via drill 0.6)
  other vias: 15.24,30.48
S$72  (via drill 0.6)
  other vias: 15.24,25.4
S$73  (via drill 0.6)
  other vias: 20.32,25.4
S$74  (via drill 0.6)
  other vias: 20.32,30.48
S$75  (via drill 0.6)
  other vias: 20.32,35.56
S$76  (via drill 0.6)
  other vias: 20.32,40.64
S$77  (via drill 0.6)
  other vias: 20.32,45.72
S$78  (via drill 0.6)
  other vias: 20.32,50.8
S$79  (via drill 0.6)
  other vias: 20.32,55.88
S$80  (via drill 0.6)
  other vias: 20.32,60.96
S$81  (via drill 0.6)
  other vias: 20.32,66.04
S$82  (via drill 0.6)
  other vias: 20.32,20.32
S$83  (via drill 0.6)
  other vias: 15.24,20.32
S$84  (via drill 0.6)
  other vias: 10.16,20.32
S$85  (via drill 0.6)
  other vias: 5.08,20.32
S$193
  Bottom 1.93: E$614.Q4 E$613.OE
S$194
  Bottom 1.93: E$613.2!R E$613.2!S 38.1,38.1 38.1,30.48
S$195  (via drill 0.6)
  Bottom 1.27: E$572.K E$509.K
  Bottom 1.93: E$572.K v25.4,25.4 E$613.2Q1
S$196
  Bottom 1.93: 43.18,30.48 43.18,35.56 E$613.GND | 43.18,30.48 40.64,30.48 | E$616.IN1 43.18,30.48
S$198
  Bottom 1.27: E$544.K E$504.K
  Bottom 1.93: E$504.K 73.66,27.94 E$599.3!R
S$199
  Bottom 1.27: E$549.K E$505.K
  Bottom 1.93: E$505.K 76.2,25.4 E$599.3!S
S$200
  Bottom 1.27: E$550.K E$506.K
  Bottom 1.93: E$506.K E$599.3Q
S$201  (via drill 0.6)
  Bottom 1.27: E$555.K E$507.K
  Bottom 1.93: E$507.K v81.28,25.4 E$599.2Q
S$202  (via drill 0.6)
  Bottom 1.27: E$573.K E$508.K
  Bottom 1.93: E$508.K v86.36,25.4 83.82,27.94 E$599.2Q1
S$203
  Bottom 1.93: E$614.CLOCK 48.26,53.34 48.26,58.42 | 48.26,58.42 E$623.CLOCK | 48.26,58.42 60.96,58.42 60.96,55.88 63.5,55.88 E$600.CLOCK
S$204
  Bottom 1.93: E$499.A 38.1,22.86 | 38.1,22.86 E$618.P$3 | 38.1,22.86 27.94,22.86 25.4,20.32 E$572.A
S$205
  Bottom 1.93: 38.1,17.78 E$617.P$3 | 38.1,17.78 20.32,17.78 E$563.A | E$514.A 38.1,17.78
S$206
  Bottom 1.93: 38.1,12.7 E$619.P$3 | 38.1,12.7 20.32,12.7 E$560.A | E$529.A 38.1,12.7
S$207
  Bottom 1.27: E$568.K E$513.K
S$208
  Bottom 1.93: E$600.Q10 76.2,60.96
S$209
  Bottom 1.93: 38.1,7.62 E$620.P$3 | E$530.A 38.1,7.62 | 38.1,7.62 20.32,7.62 E$528.A
S$210
  Bottom 1.93: 38.1,2.54 E$621.P$3 | E$534.A 38.1,2.54 | 38.1,2.54 20.32,2.54 E$509.A
S$211  (via drill 0.6)
  Bottom 1.27: E$583.K E$575.K
  Bottom 1.93: E$613.VCC v25.4,60.96 E$583.K
S$213  (via drill 0.6)
  Bottom 1.27: E$543.K E$503.K
  Bottom 1.93: E$503.K v66.04,25.4 71.12,30.48 E$599.1Q
S$214  (via drill 0.6)
  Top 1.93: E$499.K v60.96,40.64
  Bottom 1.27: E$534.K E$499.K
  Bottom 1.93: v60.96,40.64 E$599.4Q
S$215  (via drill 0.6)
  Bottom 1.93: 53.34,35.56 v50.8,35.56
S$216
  Bottom 1.93: E$624.1 E$614.Q8
S$218  (via drill 0.6)
  Bottom 1.93: E$623.Q11 v30.48,68.58
  other vias: 33.02,68.58
S$219  (via drill 0.6)
  Bottom 1.93: E$621.P$2 v30.48,5.08
S$220  (via drill 0.6)
  Bottom 1.93: E$620.P$2 v30.48,10.16
S$221  (via drill 0.6)
  Bottom 1.93: E$619.P$2 v30.48,15.24
S$222  (via drill 0.6)
  Bottom 1.93: E$617.P$2 v30.48,20.32
S$223
  Bottom 1.93: E$599.OE E$600.Q4
S$224
  Bottom 1.93: E$599.GND 81.28,40.64 86.36,40.64 86.36,48.26
S$225
  Bottom 1.93: 81.28,48.26 76.2,48.26 E$599.2!R E$599.2!S
S$226  (via drill 0.6)
  Bottom 1.27: E$538.K E$502.K
  Bottom 1.93: E$502.K v60.96,25.4 68.58,33.02 E$599.4!R
S$227
  Bottom 1.93: E$600.Q9 E$603.IN1
S$228  (via drill 0.6)
  Bottom 1.93: v35.56,58.42 E$623.Q10
S$229  (via drill 0.6)
  Bottom 1.93: v38.1,58.42 E$623.Q9
S$230  (via drill 0.6)
  Bottom 1.93: v43.18,58.42 E$623.Q8
S$231  (via drill 0.6)
  Bottom 1.93: v40.64,58.42 E$623.Q7
S$232
  Bottom 1.93: E$600.Q7 E$630.IN2
S$233
  Bottom 1.93: E$600.Q8 68.58,60.96
S$234  (via drill 0.6)
  Top 1.93: v55.88,55.88 v55.88,60.96
  Bottom 1.93: v55.88,60.96 E$623.Q0 | E$614.Q0 v55.88,55.88 58.42,55.88 58.42,53.34 E$600.Q0
S$235
  Bottom 1.27: E$533.K E$500.K
  Bottom 1.93: E$599.VCC 63.5,33.02 58.42,27.94 50.8,27.94 48.26,25.4 E$500.K
S$236
  Bottom 1.93: E$600.RESET 66.04,50.8 E$614.RESET 45.72,50.8 E$623.RESET
S$237  (via drill 0.6)
  Bottom 1.93: E$618.P$2 v30.48,25.4
S$238
  Bottom 1.93: 53.34,45.72 E$614.Q7
S$239
  Bottom 1.93: 53.34,43.18 E$614.Q9
S$240
  Bottom 1.93: E$627.1 E$614.Q10
S$241  (via drill 0.6)
  Bottom 1.27: E$571.K E$510.K
  Bottom 1.93: E$613.2Q 30.48,35.56 v25.4,30.48 E$571.K
S$242  (via drill 0.6)
  Bottom 1.27: E$570.K E$511.K
  Bottom 1.93: E$613.3Q 27.94,38.1 v25.4,35.56 E$570.K
S$243  (via drill 0.6)
  Bottom 1.27: E$569.K E$512.K
  Bottom 1.93: E$613.3!S v25.4,40.64 E$569.K
S$244
  Bottom 1.93: E$613.3!R 22.86,43.18
S$245
  Bottom 1.93: E$600.Q11 83.82,45.72 83.82,50.8 E$611.IN1
S$246  (via drill 0.6)
  Bottom 1.27: E$586.K E$578.K
  Bottom 1.93: E$613.1Q v26.67,45.72 25.4,45.72 E$586.K
S$247  (via drill 0.6)
  Bottom 1.27: E$585.K E$577.K
  Bottom 1.93: E$613.4!R 27.94,48.26 v25.4,50.8 E$585.K
S$248  (via drill 0.6)
  Bottom 1.27: E$584.K E$576.K
  Bottom 1.93: E$613.4!S 30.48,50.8 v25.4,55.88 E$584.K
S$250
  Bottom 1.93: E$614.Q11 45.72,38.1 E$615.1
S$251  (via drill 0.6)
  Bottom 1.93: E$613.1!S 48.26,48.26 48.26,38.1 | 48.26,38.1 E$614.VCC 58.42,38.1 E$627.2 58.42,48.26 68.58,48.26 | 48.26,38.1 E$615.2 v48.26,33.02 | E$623.VCC 33.02,66.04 38.1,66.04 | 66.04,58.42 E$609.IN2 | 38.1,66.04 E$623.Q4 | 66.04,66.04 58.42,66.04 | 58.42,66.04 55.88,66.04 | 55.88,66.04 38.1,66.04 | 66.04,66.04 66.04,58.42 | 66.04,66.04 78.74,66.04 78.74,58.42 | 68.58,48.26 68.58,50.8 78.74,50.8 E$600.VCC 78.74,55.88 | 68.58,48.26 E$599.1!S | 78.74,58.42 78.74,55.88 | 78.74,58.42 E$604.IN2 E$631.IN2 | 78.74,55.88 E$605.IN2 | 66.04,58.42 E$607.IN1 | 58.42,66.04 E$6.IN1 | 55.88,66.04 E$5.IN1
S$252
  Bottom 1.27: E$582.K E$574.K
S$253  (via drill 0.6)
  Bottom 1.93: E$629.IN1 v58.42,60.96
S$254  (via drill 0.6)
  Bottom 1.93: E$630.IN1 v60.96,63.5
S$255  (via drill 0.6)
  Bottom 1.93: E$611.IN2 v86.36,60.96
S$256  (via drill 0.6)
  Bottom 1.93: E$603.IN2 v81.28,66.04
S$257  (via drill 0.6)
  Bottom 1.93: E$606.IN2 v83.82,63.5
S$259  (via drill 0.6)
  Bottom 1.93: v55.88,53.34 E$628.IN2

## Text on the board
tPlace: D | S | G | D | S | G | D | S | G | D | S | G | D | S | G